# Altium PCB hexbot_气体传感器.PcbDoc
Units mil, origin at the board's own origin, x right, y up, seen from the top; angles counter-clockwise.
Board outline 3150.15 x 2730 mil, 2 copper layers (Top Layer, Bottom Layer); 35 components, 17 nets, 114 pads, 4 vias.
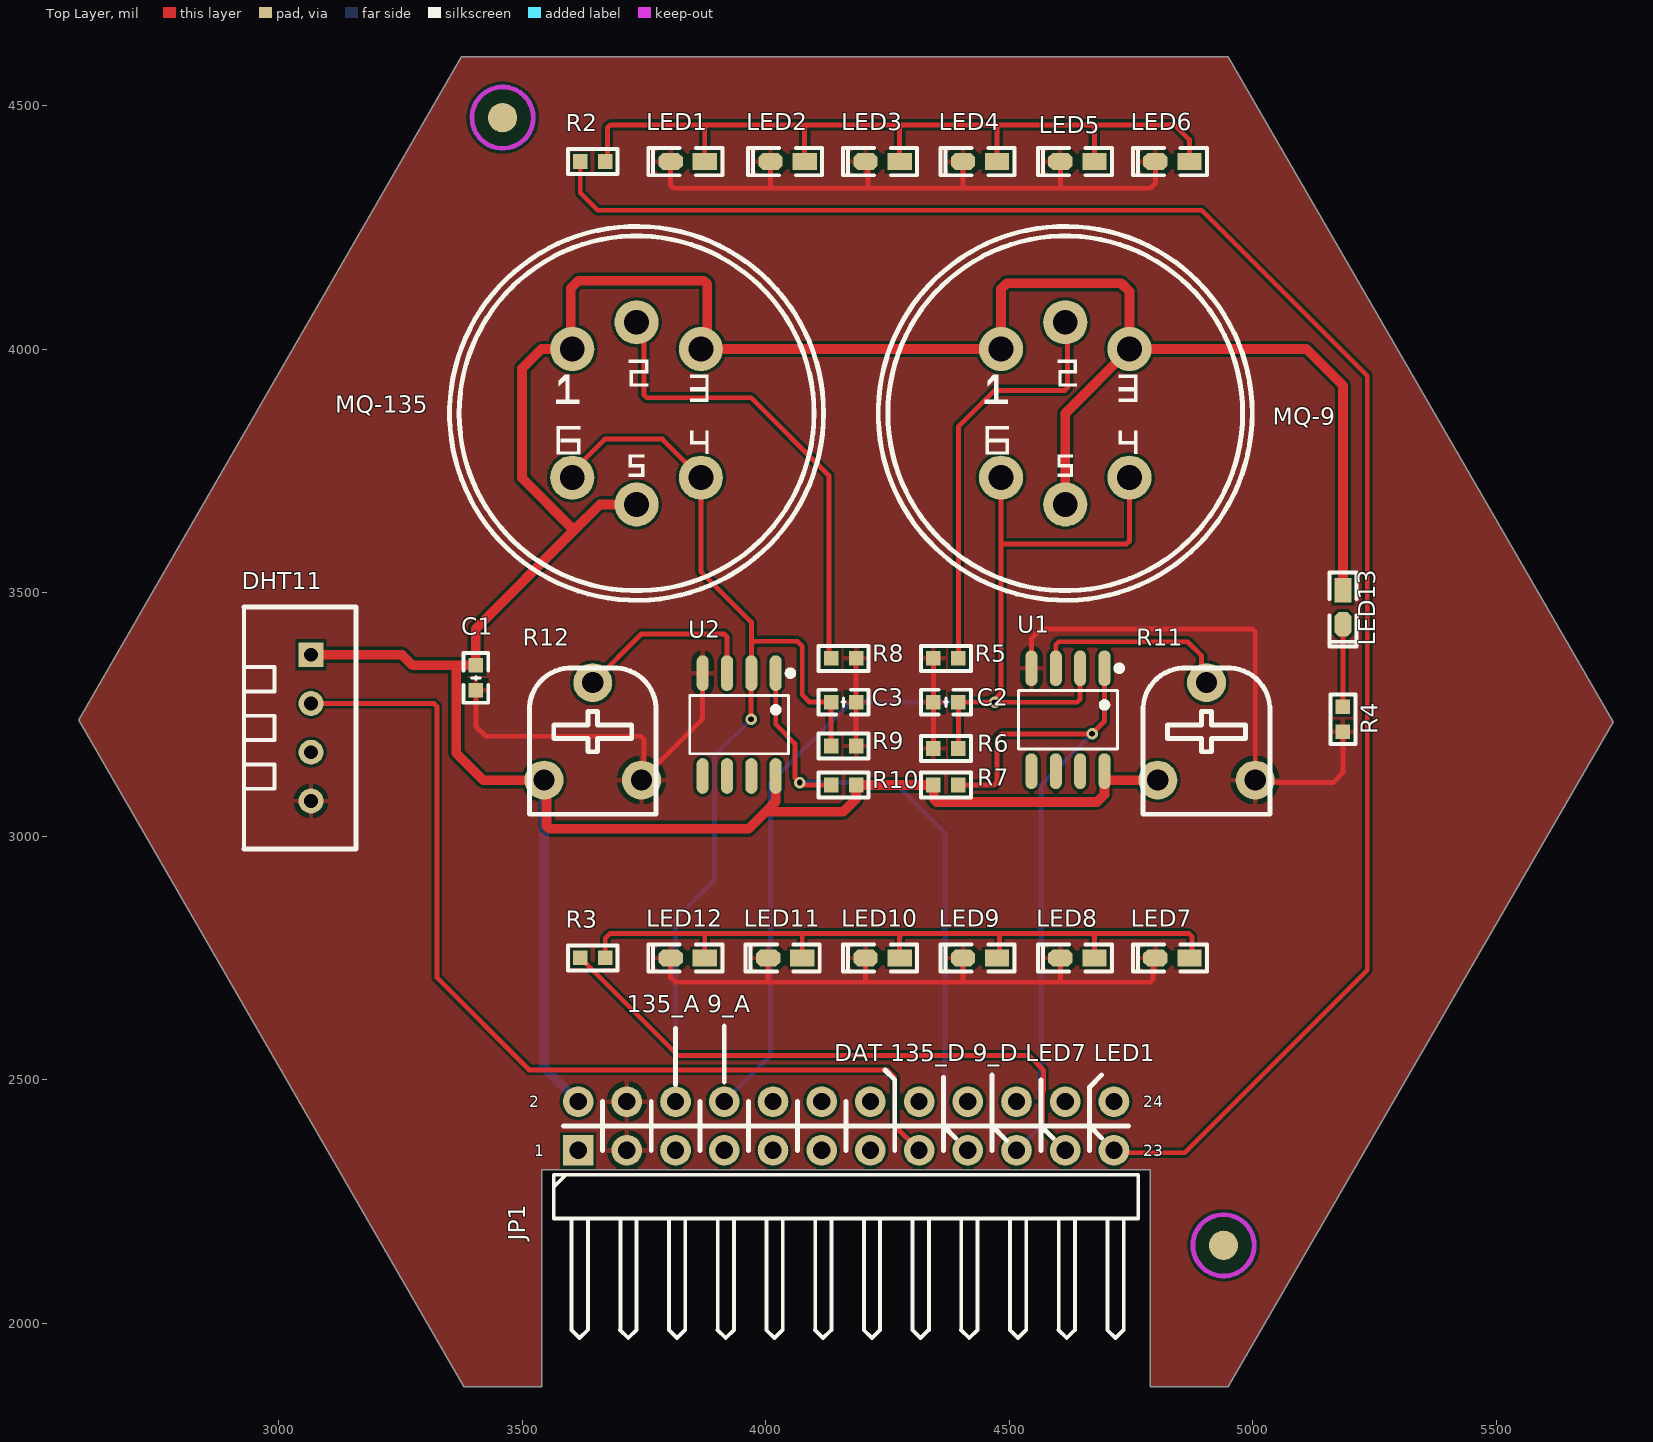
[diagram p0: Top Layer view]
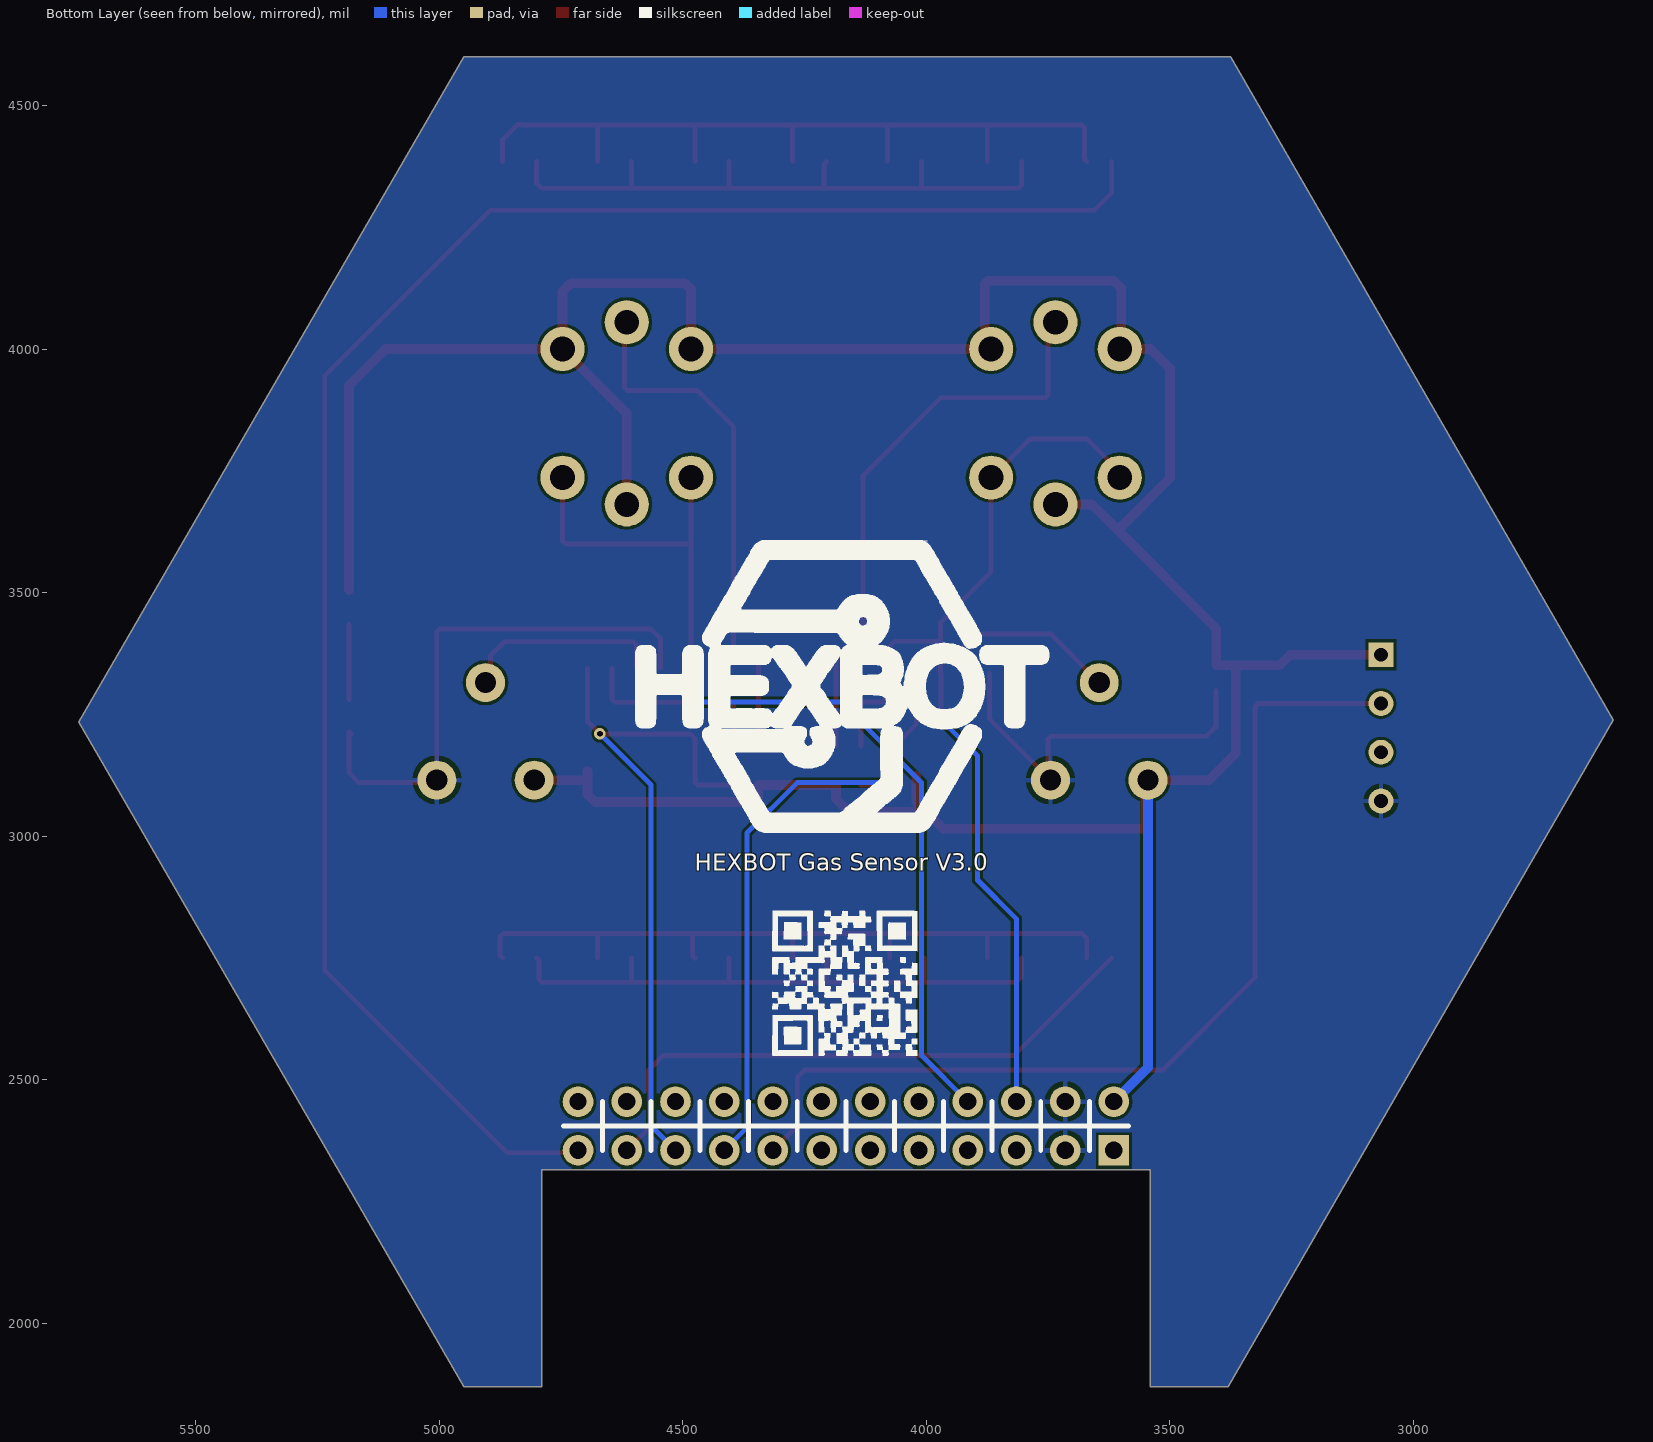
[diagram p1: Bottom Layer view, seen from below]

## Layer stack, top to bottom
Top Solder: solder mask 0.4, Solder Resist, Dk 3.5
Top Layer: signal copper 1.4
Dielectric 1: dielectric 12.6, FR-4, Dk 4.8
Bottom Layer: signal copper 1.4
Bottom Solder: solder mask 0.4, Solder Resist, Dk 3.5

## Board outline
3380,1870 2589.85,3238.69 3375.29,4600 4950,4600 5740,3234.61 4950,1870 4790,1870 4790,2314.64 3540,2314.64 3540,1870

## Design rules (kind name [scope] priority, off if disabled: settings)
Clearance [All] p1: gap=6 ignorepadtopadclearanceinfootprint=FALSE
PolygonConnect [All] p1: connectstyle=Relief reliefconductorwidth=10 reliefentries=4 polygonreliefangle="90 Angle" airgapwidth=10
RoutingVias [All] p1: holewidth=28 width=50 viastyle="Through Hole" minholewidth=28 minwidth=50 maxholewidth=28 maxwidth=50
SolderMaskExpansion [All] p1: expansion=4 istentingtop=FALSE
Width [All] p1: maxlimit=20 minlimit=5 preferedwidth=10
30 further rules are at their usual default settings.

## Components (designator, comment, footprint, x,y, rotation, side; value= is the part's Value field where it differs from the comment)
C1 "0.1uF" "C 0603_L" 3405,3325 r90 top
C2 "0.1uF" "C 0603_L" 4370,3275 r0 top
C3 "0.1uF" "C 0603_L" 4160,3275 r180 top
DHT11 "DHT11" DHT11 3035,3250 r270 top
JP1 "Header 2X11" HDR2.54-WI-2x12P 4165,2405 r0 top
LED1 "红色" "LED 0603R" 3840,4385 r180 top
LED2 "红色" "LED 0603R" 4045,4385 r180 top
LED3 "红色" "LED 0603R" 4240,4385 r180 top
LED4 "红色" "LED 0603R" 4440,4385 r180 top
LED5 "红色" "LED 0603R" 4640,4385 r180 top
LED6 "红色" "LED 0603R" 4835,4385 r180 top
LED7 "红色" "LED 0603R" 4835,2750 r180 top
LED8 "红色" "LED 0603R" 4640,2750 r180 top
LED9 "红色" "LED 0603R" 4440,2750 r180 top
LED10 "红色" "LED 0603R" 4240,2750 r180 top
LED11 "红色" "LED 0603R" 4040,2750 r180 top
LED12 "红色" "LED 0603R" 3840,2750 r180 top
LED13 "红色" "LED 0603R" 5185,3470 r270 top
mark1 "Mark" Mark 3460,4475 r90 top
mark2 "Mark" Mark 4940,2160 r90 top
MQ-9 "MQ-9" MQ 4615,3870 r0 top
MQ-135 "MQ-9" MQ 3735,3870 r0 top
R2 "1K" "R 0603_L" 3645,4385 r180 top
R3 "1K" "R 0603_L" 3645,2750 r180 top
R4 "1K" "R 0603_L" 5185,3240 r90 top
R5 "5.1" "R 0603_L" 4370,3365 r0 top
R6 "1K" "R 0603_L" 4370,3180 r0 top
R7 "10K" "R 0603_L" 4370,3105 r180 top
R8 "5.1" "R 0603_L" 4160,3365 r180 top
R9 "1K" "R 0603_L" 4160,3185 r180 top
R10 "10K" "R 0603_L" 4160,3105 r0 top
R11 "RM065-V1-103" RM065 4905,3315 r0 top
R12 "RM065-V1-103" RM065 3645,3315 r0 top
U1 "LM393" LM393 4635,3245 r180 top
U2 "LM393" LM393 3960,3235 r180 top

## Footprints (in the part's own frame and the unit in brackets; to place one, negate y for a bottom-side part, rotate by r counter-clockwise, add the part's x,y. Pads: shape width x height; smd on the part's side, far side on the other; paste and mask are expansions set on the pad)
"C 0603_L" [mil] "无极性贴片电容                                       淘宝ID:黄晶宝石"
  rect 30x30 smd: 1(-25.59,0) 2(25.59,0)
  silkscreen extent -51,-26 51,26, body extent -31,-16 31,16, height 32
DHT11 [mil]
  rect 51x51 hole 28 mask+2: 1(-122.24,31.75)
  round 51 hole 28 mask+2: 2(-22.25,31.75) 3(77.75,31.75) 4(177.76,31.75)
  silkscreen extent -221,-106 276,124
HDR2.54-WI-2x12P [mm] "双排弯脚排针，12x2脚  淘宝ID:黄晶宝石   店铺网址:https://shop463601444.taobao.com"
  rect 1.6x1.6 hole 0.9: 1(-13.97,-1.27)
  round 1.6 hole 0.9: 2(-13.97,1.27) 3(-11.43,-1.27) 4(-11.43,1.27) 5(-8.89,-1.27) 6(-8.89,1.27) 7(-6.35,-1.27) 8(-6.35,1.27) 9(-3.81,-1.27) 10(-3.81,1.27) 11(-1.27,-1.27) 12(-1.27,1.27) 13(1.27,-1.27) 14(1.27,1.27) 15(3.81,-1.27) 16(3.81,1.27) 17(6.35,-1.27) 18(6.35,1.27) 19(8.89,-1.27) 20(8.89,1.27) 21(11.43,-1.27) 22(11.43,1.27) 23(13.97,-1.27) 24(13.97,1.27)
  silkscreen extent -15.24,-11.06 15.24,1.27, body extent -15.24,-11.23 15.24,1.62, height 5.1
"LED 0603R" [mil] "红色0603LED                                           淘宝ID:黄晶宝石"
  rect 50x35 smd: 1(-35,0.26)
  oct 50x35 smd: 2(35,0.26)
  silkscreen extent -71,-28 81,28, body extent -31,-16 31,16, height 18
LM393 [mm]
  oval 0.63x1.865 smd mask+0.051: 1(-1.54,-2.531) 2(-0.27,-2.531) 3(1,-2.531) 4(2.27,-2.531) 5(2.27,2.834) 6(1,2.834) 7(-0.27,2.834) 8(-1.54,2.834)
  silkscreen extent -2.46,-2.68 2.94,1.67
Mark [mil]
  round 60 smd mask+39.37: mark(0,0)
  Top Layer keep-out circle w10: c0,0 r62.99
MQ [mm]
  round 2.3 hole 1.3 mask+0.051: 1(-3.353,3.302) 2(0,4.699) 3(3.353,3.302) 4(3.353,-3.404) 5(0,-4.801) 6(-3.353,-3.404)
  silkscreen extent -9.75,-9.8 9.75,9.7
"R 0603_L" [mil] "1/10W贴片电阻                 淘宝ID:黄晶宝石"
  rect 30x30 smd: 1(-25.59,0) 2(25.59,0)
  silkscreen extent -51,-26 51,26, body extent -31,-16 32,16, height 16
RM065 [mil] "蓝白可调电位器                              淘宝ID:黄晶宝石"
  round 80 hole 43.31: 1(-100,-200) 2(0,0) 3(100,-200)
  silkscreen extent -130,-270 130,30, body extent -128,-269 128,30, height 299

## Part data
C1 C2 C3: library part C, "贴片电容", BOM名称=无极性贴片电容, 唯一出售店铺网址=https://shop463601444.taobao.com, 淘宝ID="封装库来自淘宝 ID：黄晶宝石", 联系售后，技术支持=https://shop463601444.taobao.com
DHT11: "传感器类型:Humidity, Temperature;输出类型:-;温度范围:-;湿度范围:-;精度:-;", JLCPCB Part Class="Extended Part", LCSC Part Name="DHT11  电容式传感器", Manufacturer=广州奥松, Operating Temperature=-, Voltage-Supply="3.3 V ~ 5.5 V", Accuracy=-, Add into BOM=yes, Convert to PCB=yes, Datasheet=https://atta.szlcsc.com/upload/public/pdf/source/20170703/1499081238365.pdf, Device=DHT11, Humidity Range=-, Manufacturer Part=DHT11, Output Type=-, Response Time=-, Sensor Type="Humidity, Temperature", Supplier=LCSC, Supplier Footprint=16.1mm*12.6mm*5.8mm, Supplier Part=C117051, Symbol=DHT11, Temperature Range=-
JP1: library part "Header 12X2", "12*2P接插件", BOM名称=12*2P接插件, 学习资源=https://shop463601444.taobao.com, 版权归属="封装库来自淘宝卖家 ID：黄晶宝石"
LED1 LED2 LED3 LED4 LED5 LED6 LED7 LED8 LED9 LED10 LED11 LED12 LED13: library part LED-SMD, "贴片LED", BOM名称=贴片LED, 学习资源=https://shop463601444.taobao.com, 版权归属="封装库来自淘宝 ID：黄晶宝石"
MQ-9 MQ-135: library part MQ-4, "MQ-4天燃气检测传感器，与MQ-2特性", JLCPCB Part Class="Extended Part", Manufacturer=Winsen(炜盛), Add into BOM=yes, Convert to PCB=yes, Datasheet=https://atta.szlcsc.com/upload/public/pdf/source/20170327/1490588065885.pdf, Device=MQ-4, LCSC Part Name=MQ-4, Manufacturer Part=MQ-4, Supplier=LCSC, Supplier Footprint="Through Hole", Supplier Part=C99756, Symbol=MQ-4
R2 R3 R4 R5 R6 R7 R8 R9 R10: library part R, "贴片电阻", BOM名称=贴片电阻, 封装库来自淘宝卖家 ID：黄晶宝石=其他店铺购入均为盗版，不享受售后技术支持服务，请立即申请退款, 版权归属="来自淘宝 ID：黄晶宝石", 联系售后=https://shop463601444.taobao.com
R11 R12: "精度:±20%;", JLCPCB Part Class="Extended Part", Add into BOM=yes, Convert to PCB=yes, Datasheet=https://atta.szlcsc.com/upload/public/pdf/source/20151026/1457707505827.pdf, Device=RM065-V1-103, LCSC Part Name=RM065-V1-103, Manufacturer Part=RM065-V1-103, NUMBER=2, Supplier=LCSC, Supplier Footprint=蓝白卧式可调插件, Supplier Part=C54661, Symbol=RM065-V1-103
U1 U2: "比较器组数:-;电源电压:-;各通道供电电流:-;输出类型:-;传播延迟:-;", JLCPCB Part Class="Extended Part", Manufacturer=IDCHIP(英锐芯), Operating Temperature=-, Add into BOM=yes, Convert to PCB=yes, Datasheet=https://atta.szlcsc.com/upload/public/pdf/source/20190624/C400839_FC3E4757065A64BC24F9F0B8EF99EFFB.pdf, Device=LM393, Iq per channel (Typ)=-, LCSC Part Name=LM393, Manufacturer Part=LM393, Number of Elements=-, Output Type=-, Propagation Delay (Max)=-, Supplier=LCSC, Supplier Footprint=SOP-8, Supplier Part=C400839, Supply Voltage（Single）=-, Symbol=LM393_C400839

## Via types
v1: diameter 23.62, hole 11.81, Top Layer to Bottom Layer, 4 vias

## Nets (pads, with @x,y where several pads share a name; then routed paths per layer and width w, separated by ;. In a path a pad name is that pad's centre, name@x,y a point inside that pad or via, vN(x,y) a via of type N, cw(c..) or ccw(c..) an arc to the next point about the centre after c; other vN are vias at no path point)
3V3: JP1.1
5V: C1.2 DHT11.1 JP1.2 LED13.1 MQ-9.1 MQ-9.3 MQ-9.5 MQ-135.1 MQ-135.3 MQ-135.5 R7.2 R10.2 R11.1 R12.1 U1.8 U2.8 | length 6954.7
  Top Layer w20: DHT11.1 3253.59,3372.24 3275.24,3350.59 3325,3350.59 3365,3350.59 ; MQ-135.5 3660,3681 3607,3628 ; U2.8 4020.61,3070.61 4000,3050 ; MQ-9.5 4615,3868 MQ-9.3 ; U1.8 U1.8@4695.61,3121.84 ; R11.1 4702.45,3115 U1.8@4695.61,3121.84 ; LED13.1 5185.26,3924.74 5110,4000 MQ-9.3 ; 3365,3350.59 C1.2 3405,3426 3607,3628 ; 3365,3350.59 3365,3170 3420,3115 R12.1 3550,3110 3550,3020.86 3555.86,3015 3965,3015 4000,3050 ; 3607,3628 3500,3735 3500,3960 3540,4000 MQ-135.1 3600,4003 3600,4125 3615,4140 3874.14,4140 3880,4134.14 3880,4013 MQ-135.3 MQ-9.1 4483,4123 4495,4135 4730,4135 4747,4118 MQ-9.3 ; 4000,3050 4159.12,3050 4185.59,3076.47 R10.2 R7.2 4345,3104.4 4345,3075.86 4350.86,3070 4680,3070 4695.61,3085.61 U1.8@4695.61,3121.84
  Bottom Layer w20: R12.1 3545,2525 JP1.2
AO: C2.2 JP1.8 MQ-9.4 MQ-9.6 R6.2 U1.2 | length 2626.7
  Top Layer w10: R6.2 C2.2 v1@4465,3275 ; MQ-9.6 MQ-9.6@4483,3727.76 ; U1.2 4645.61,3280.85 4639.75,3275 v1@4465,3275 ; MQ-9.4 4747,3605.86 4741.14,3600 4483,3600 MQ-9.6@4483,3727.76 ; v1@4465,3275 4483,3293 MQ-9.6@4483,3727.76
  Bottom Layer w10: JP1.8 4010,2550 4010,3110 4175,3275 v1(4470,3275)
AO1: C3.2 JP1.6 MQ-135.4 MQ-135.6 R9.2 U2.2 | length 2091.4
  Top Layer w10: MQ-135.6 3603,3748 3670,3815 3788,3815 MQ-135.4 3867,3543 3970.61,3439.39 3970.61,3394.14 ; v1(3970,3240) 3970,3334.02 U2.2 3970.61,3394.14 ; R9.2 C3.2 4090,3275 4075,3290 4075,3390 4065,3400 3976.47,3400 3970.61,3394.14
  Bottom Layer w10: JP1.6 3815,2830 3895,2910 3895,3165 v1(3970,3240)
DAT: DHT11.2 JP1.15 | length 2012.7
  Top Layer w10: DHT11.2 3319.14,3272.25 3325,3266.39 3325,2710 3515,2520 4250,2520 4265,2505 4265,2405 JP1.15
DO: JP1.19 R7.1 U1.1 | length 1434.6
  Top Layer w10: R7.1 4469.14,3105 4475,3110.86 4475,3200 4485,3210 v1(4670,3210) 4695.61,3235.61 U1.1
  Bottom Layer w10: JP1.19 4565,2405 4565,3105 v1(4670,3210)
DO1: JP1.17 R10.1 U2.1 | length 1323.7
  Top Layer w10: U2.1 4020.61,3229.39 4060,3190 4060,3120 v1(4070,3110) 4075,3105 R10.1
  Bottom Layer w10: v1(4070,3110) 4265,3110 4368.5,3006.5 4368.5,2401.5 JP1.17
GND: C1.1 C2.1 C3.1 DHT11.4 JP1.3 JP1.4 LED1.2 LED2.2 LED3.2 LED4.2 LED5.2 LED6.2 LED7.2 LED8.2 LED9.2 LED10.2 LED11.2 LED12.2 R4.1 R5.1 R6.1 R8.1 R9.1 R11.3 R12.3 U1.4 U2.4 | length 4865.6
  Top Layer w10: C1.1 3405,3225 3425,3205 3744.14,3205 3750,3199.14 R12.3@3750,3120 ; R12.3 R12.3@3750,3120 ; LED12.2 3805,2710 3815,2700 4010,2700 ; LED1.2 3805,4335.86 3810.85,4330 4010,4330 ; U2.4 3870.61,3240.61 R12.3@3750,3120 ; LED11.2 4005,2705 4010,2700 ; LED2.2 4010,4330 ; R9.1 C3.1 R8.1 ; LED10.2 4205,2700 ; LED3.2 4210,4379.74 4210,4330 ; R6.1 R5.1 ; LED9.2 4405,2705 4400,2700 ; LED4.2 4405,4330 ; U1.4 4545.61,3405.61 4565,3425 4999.14,3425 5005,3419.14 R11.3 5010,3110 5165,3110 5185,3130 R4.1 R4.1@5180.6,3210 ; LED8.2 4605,2700 ; LED5.2 4605,4335 4610,4330 ; LED7.2 4795,2744.75 4795,2705.86 4789.14,2700 4605,2700 ; LED6.2 4800,4340 4790,4330 4610,4330 ; 4010,2700 4205,2700 ; 4010,4330 4210,4330 ; 4205,2700 4400,2700 ; 4210,4330 4405,4330 ; 4400,2700 4605,2700 ; 4405,4330 4610,4330
LED1_6: JP1.23 R2.2 | length 3733
  Top Layer w10: R2.2 3619.41,4320.59 3655,4285 4895,4285 5235,3945 5235,2725 4860,2350 4720,2350 JP1.23
LED7_12: JP1.21 R3.2 | length 1230.8
  Top Layer w10: R3.2 3640.59,2728.82 3819.39,2550 4540,2550 4570,2520 4570,2475.76 4568.5,2474.26 4568.5,2401.5 JP1.21
NetLED2_1: LED1.1 LED2.1 LED3.1 LED4.1 LED5.1 LED6.1 R2.1 | length 1711.4
  Top Layer w10: R2.1 3675,4389.41 3675,4454.14 3680.86,4460 3880,4460 ; LED1.1 3875,4455 3880,4460 ; LED2.1 4080,4455 4085,4460 ; LED3.1 4275,4455 4280,4460 ; LED4.1 4475,4460 ; LED5.1 4675,4455 4670,4460 ; LED6.1 4870,4430 4839.14,4460.86 4830.86,4460.86 4830,4460 4670,4460 ; 3880,4460 4085,4460 ; 4085,4460 4280,4460 ; 4280,4460 4475,4460 ; 4475,4460 4670,4460
NetLED7_1: LED7.1 LED8.1 LED9.1 LED10.1 LED11.1 LED12.1 R3.1 | length 1556.3
  Top Layer w10: R3.1 3670.59,2790.59 3680,2800 3877.5,2800 ; LED12.1 3875,2797.5 3877.5,2800 ; LED11.1 4075,2800 ; LED10.1 4275,2795 4280,2800 ; LED9.1 4480,2754.75 4480,2800 ; LED8.1 4675,2795 4670,2800 ; LED7.1 4875,2754.75 4875,2794.14 4869.14,2800 4670,2800 ; 3877.5,2800 4075,2800 ; 4075,2800 4280,2800 ; 4280,2800 4480,2800 ; 4480,2800 4670,2800
NetLED13_2: LED13.2 R4.2 | length 154.5
  Top Layer w10: 5185,3280.59 5185.26,3280.84 LED13.2
NetMQ-9_2: MQ-9.2 R5.2 | length 869.5
  Top Layer w10: R5.2 4395.59,3840.59 4470,3915 4614.14,3915 4620,3920.86 4620,4050 MQ-9.2
NetMQ-135_2: MQ-135.2 R8.2 | length 980.9
  Top Layer w10: MQ-135.2 3750,4040 3750,3905.86 3755.86,3900 3970,3900 4130,3740 4130,3369.42 R8.2
NetR11_2: R11.2 U1.3 | length 421.4
  Top Layer w10: U1.3 4595.61,3393.09 4601.47,3398.95 4866.05,3398.95 4895,3370 4895,3325 R11.2
NetR12_2: R12.2 U2.3 | length 394
  Top Layer w10: R12.2 3745,3415 3914.75,3415 3920.61,3409.14 U2.3
pads on no net: DHT11.3 JP1.5 JP1.7 JP1.9 JP1.10 JP1.11 JP1.12 JP1.13 JP1.14 JP1.16 JP1.18 JP1.20 JP1.22 JP1.24 mark1.mark mark2.mark U1.5 U1.6 U1.7 U2.5 U2.6 U2.7

## Polygon pours and split planes (outlines as drawn)
GND on Bottom Layer "Top Layer-No Net" (solid, remove dead copper, pour order 4): 3380,1870 2589.85,3238.69 3375.29,4600 4950,4600 5740,3234.61 4950,1870 4790,1870 4790,2314.64 3540,2314.64 3540,1870
GND on Top Layer "Top Layer-No Net1" (solid, remove dead copper, pour order 5): 3380,1870 2589.85,3238.69 3375.29,4600 4950,4600 5740,3234.61 4950,1870 4790,1870 4790,2314.64 3540,2314.64 3540,1870

## Silkscreen, mask and mechanical layers (free items; w line width, h text height)
Top Overlay:
  lines w10: 3815,2490 3815,2605 ; 3915,2495 3915,2610 ; 4245,2520 4265,2500 4265,2455 ; 4365,2405 4390,2380 ; 4365,2455 4365,2505 ; 4465,2405 4495,2375 ; 4465,2455 4465,2500 4465,2510 ; 4565,2405 4590,2380 ; 4565,2455 4565,2500 ; 4665,2405 4690,2380 ; 4665,2455 4665,2485 4690,2510
  text "135_A 9_A" at 3715.17,2626.06 h60
  text "DAT 135_D 9_D LED7 LED1" at 4141.21,2526.06 h60
Bottom Overlay:
  drawing of 2418 lines, arcs and shapes, not listed
  text "HEXBOT Gas Sensor V3.0" at 4475.62,2917.86 h59.06
Mechanical 1:
  the board outline again, w10

## Text inside footprints (layer, text, board x,y; h text height)
JP1: Top Overlay "1" at 3525,2335 h40; Top Overlay "2" at 3515,2435 h40; Top Overlay "23" at 4775,2335 h40; Top Overlay "24" at 4775,2435 h40